# Altium PCB Flahser_4CH_555.PcbDoc
Units mil, origin at the board's own origin, x right, y up, seen from the top; angles counter-clockwise.
Board outline 3937.01 x 1968.5 mil, 2 copper layers (Top Layer, Bottom Layer); 40 components, 31 nets, 110 pads, 0 vias.
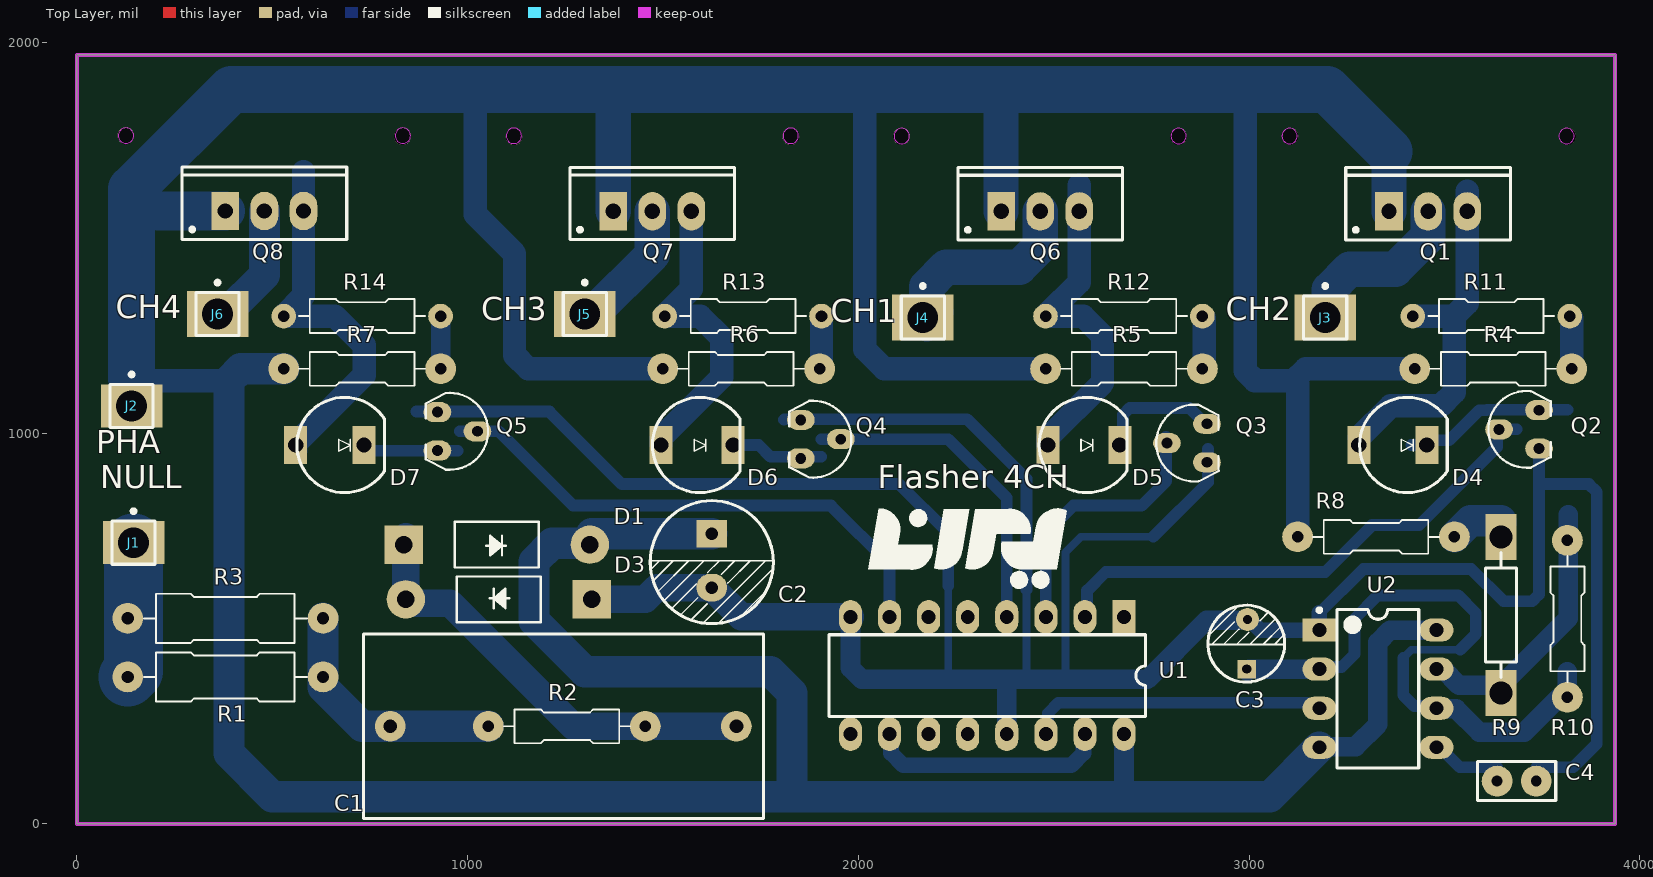
[diagram p0: Top Layer view]
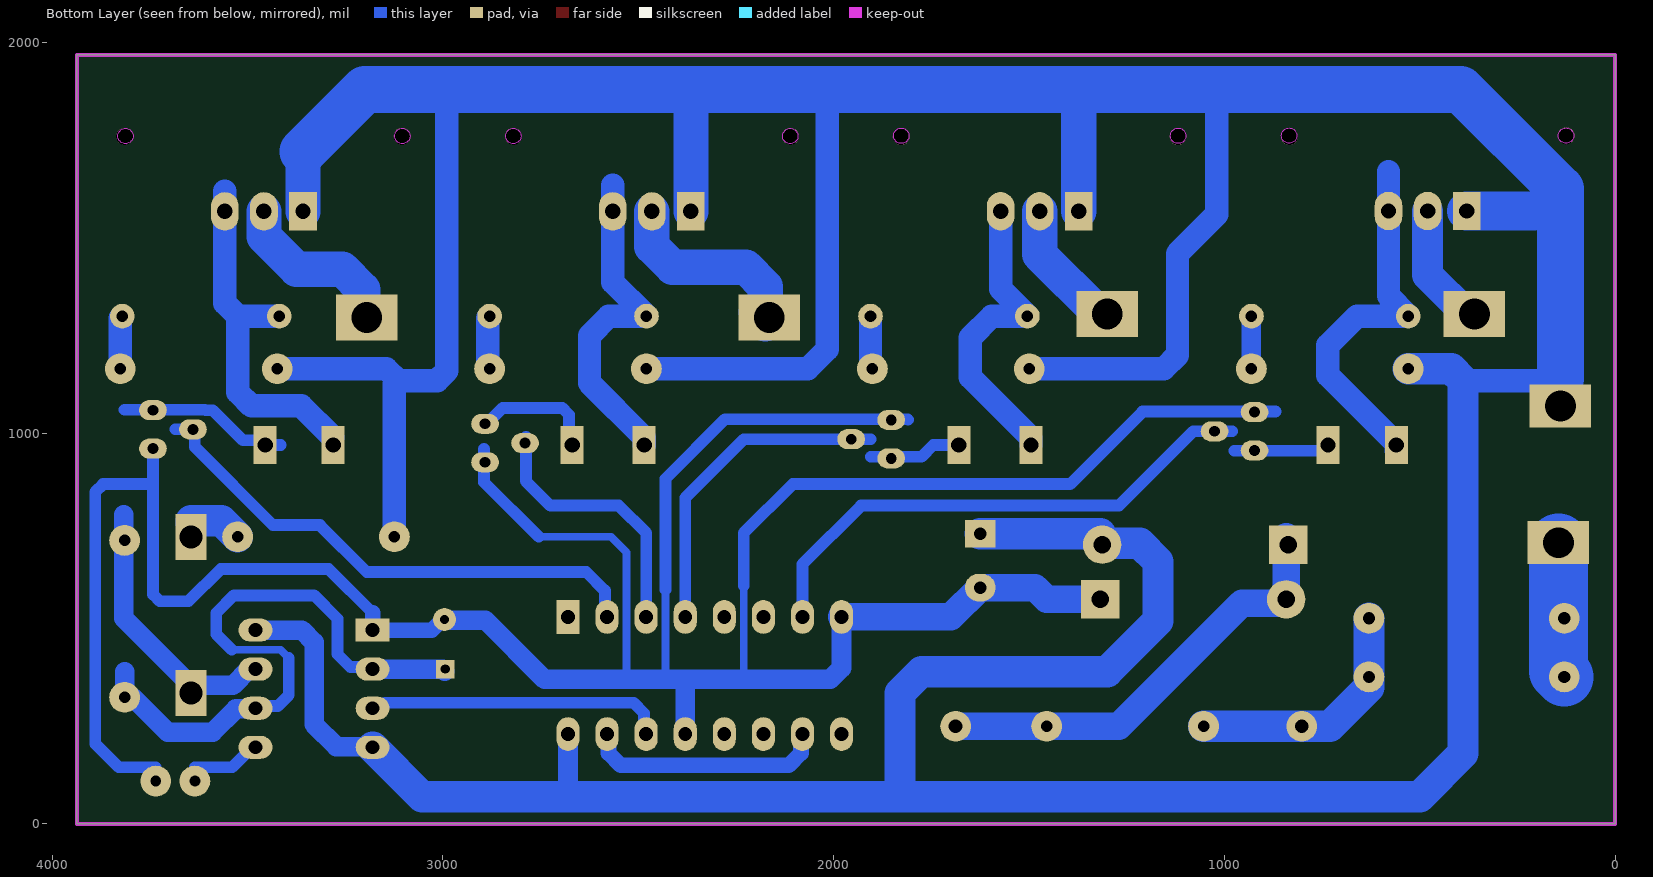
[diagram p1: Bottom Layer view, seen from below]
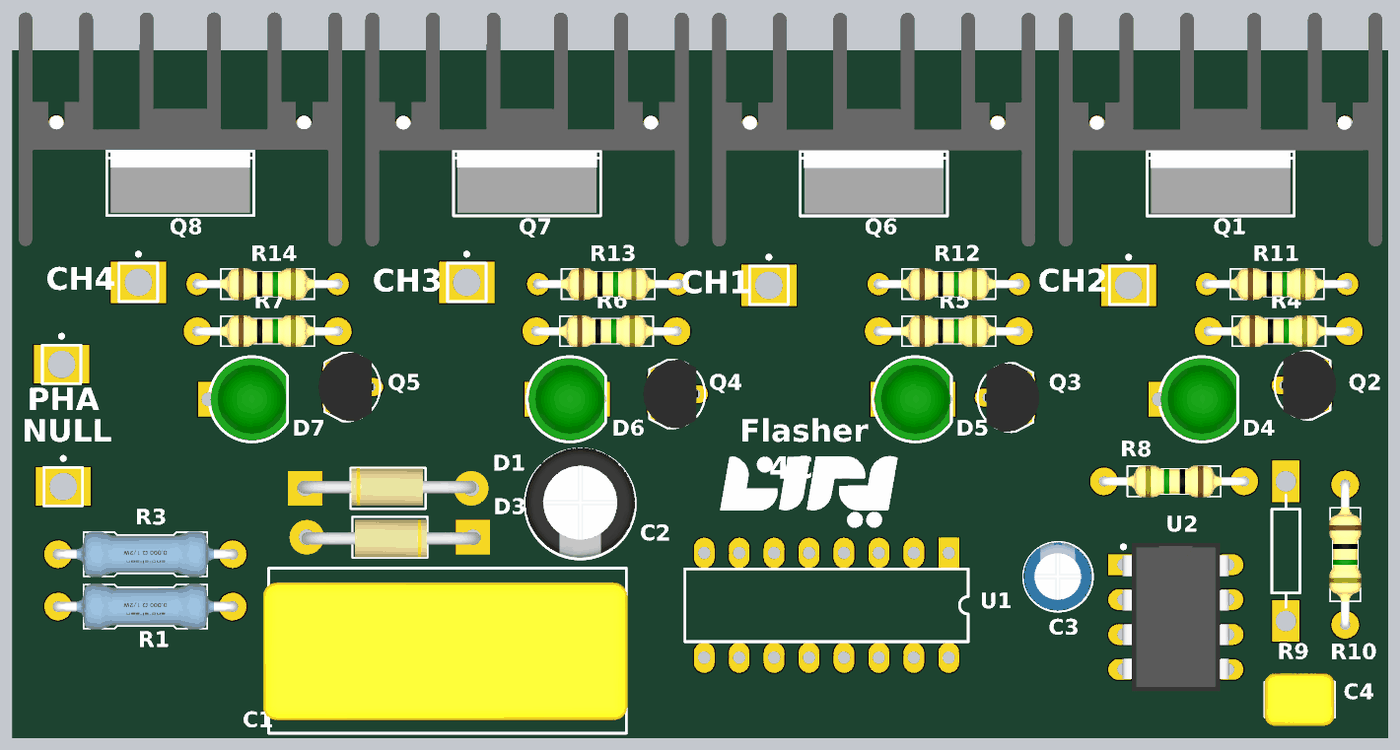
[diagram p2: 3D render of the assembled board from above, using the file's embedded part models]

## Layer stack, top to bottom
Top Solder: solder mask 0.4, Solder Resist, Dk 3.5
Top Layer: signal copper 1.4
Dielectric 1: dielectric 12.6, FR-4, Dk 4.8
Bottom Layer: signal copper 1.4
Bottom Solder: solder mask 0.4, Solder Resist, Dk 3.5

## Board outline
0,0 3937.01,0 3937.01,1968.5 0,1968.5

## Design rules (kind name [scope] priority, off if disabled: settings)
Clearance [All] p1: gap=10 ignorepadtopadclearanceinfootprint=FALSE except(0: Arc-Hole Track-Hole SMDPad-Hole THPad-Hole Via-Hole Fill-Hole Poly-Hole Region-Hole Text-Hole)
PolygonConnect [All] p1: connectstyle=Relief reliefconductorwidth=10 reliefentries=4 polygonreliefangle="90 Angle" airgapwidth=10
RoutingVias [All] p1: holewidth=28 width=50 viastyle="Through Hole" minholewidth=28 minwidth=50 maxholewidth=28 maxwidth=50
SolderMaskExpansion [All] p1: expansion=4 istentingtop=FALSE
Width [All] p1: maxlimit=500 minlimit=10 preferedwidth=30 minimp=50.000000 maximp=50.000000 favimp=50.000000
30 further rules are at their usual default settings.

## Components (designator, comment, footprint, x,y, rotation, side; value= is the part's Value field where it differs from the comment)
C1 "Cap" Cap_polyester_275V_P22.5 1245,250 r180 top value=1uF/275V/X2
C2 "Cap2" "Cap electrolitic radial 8x12-3.5" 1625,673.9 r270 top value=470uF/16V
C3 "Cap2" "Cap electrolitic radial 5x11-2" 2995,460 r90 top value=100uF/16V
C4 "Cap" CAP_MLCC_RAD_0.1 3685,110 r180 top value=10nF
D1 "Diode 1N4007" DO-204AL 1070,710 r0 top
D3 "Diode 1N4007" DO-204AL 1085,580 r180 top
D4 "LED0" LED5MM_RED#1 3405,970 r0 top
D5 "LED0" LED5MM_RED#2 2585,970 r0 top
D6 "LED0" LED5MM_RED#2 1595,970 r0 top
D7 "LED0" LED5MM_RED#3 685,970 r0 top
J1 "Socket" PIN1#1 145,720 r0 top
J2 "Socket" PIN1#1 140,1070 r0 top
J3 "Socket" PIN1#2 3195,1296.3 r0 top
J4 "Socket" PIN1#2 2165,1296.3 r0 top
J5 "Socket" PIN1#2 1300,1305 r0 top
J6 "Socket" PIN1#2 360,1305 r0 top
Q1 "BT137-600" "TO-220 AB with heatsink ya25" 3458.28,1567.83 r0 top
Q2 "2N3904" "TO-92 CF" 3695,1010 r270 top
Q3 "2N3904" "TO-92 CF" 2845,975 r270 top
Q4 "2N3904" "TO-92 CF" 1900,985 r90 top
Q5 "2N3904" "TO-92 CF" 970,1005 r90 top
Q6 "BT137-600" "TO-220 AB with heatsink ya25" 2465.52,1567.83 r0 top
Q7 "BT137-600" "TO-220 AB with heatsink ya25" 1472.76,1568.5 r0 top
Q8 "BT137-600" "TO-220 AB with heatsink ya25" 480,1568.93 r0 top
R1 "Res1" "Axial 0_5W 5_0mm" 380,376.3 r180 top value=100/0.5W
R2 "Res1" "Axial 0_25 W, 0_4 IN LEAD PITCH"#1 1254.21,250 r180 top value=470K
R3 "Res1" "Axial 0_5W 5_0mm" 380,526.3 r180 top value=100/0.5W
R4 "Res1" "Axial 0_25 W, 0_4 IN LEAD PITCH"#1 3625,1165 r0 top value=100
R5 "Res1" "Axial 0_25 W, 0_4 IN LEAD PITCH"#1 2680,1165 r0 top value=100
R6 "Res1" "Axial 0_25 W, 0_4 IN LEAD PITCH"#1 1700,1165 r0 top value=100
R7 "Res1" "Axial 0_25 W, 0_4 IN LEAD PITCH"#1 730,1165 r0 top value=100
R8 "Res1" "Axial 0_25 W, 0_4 IN LEAD PITCH"#1 3325,735 r180 top value=1K
R9 "Res Adj1" AXIAL-0.4 3645,535 r90 top value=10K
R10 "Res1" "Axial 0_25 W, 0_4 IN LEAD PITCH"#1 3815,525 r270 top value=1K
R11 "Res1" "Axial 0_25 W, 0_4 IN LEAD PITCH"#2 3620,1300 r0 top value=270
R12 "Res1" "Axial 0_25 W, 0_4 IN LEAD PITCH"#2 2680,1300 r0 top value=270
R13 "Res1" "Axial 0_25 W, 0_4 IN LEAD PITCH"#2 1705,1300 r0 top value=270
R14 "Res1" "Axial 0_25 W, 0_4 IN LEAD PITCH"#2 730,1300 r0 top value=270
U1 "HCF4017BEY" DIP16 2330,380 r180 top
U2 "LM555CN" 8P3 3330,346.3 r0 top

## Footprints (in the part's own frame and the unit in brackets; to place one, negate y for a bottom-side part, rotate by r counter-clockwise, add the part's x,y. Pads: shape width x height; smd on the part's side, far side on the other; paste and mask are expansions set on the pad)
8P3 [mm] "DIP, 8-Leads, Row Spacing 7.62mm, Pitch 2.54mm, Body 9.59x6.61mm"
  rect 2.2x1.5 hole 0.9: 1(-3.81,3.81)
  oval 2.2x1.5 hole 0.9: 2(-3.81,1.27) 3(-3.81,-1.27) 4(-3.81,-3.81) 5(3.81,-3.81) 6(3.81,-1.27) 7(3.81,1.27) 8(3.81,3.81)
  silkscreen extent -3.93,-5.15 2.65,5.23, body extent -3.88,-5.4 3.88,5.4, height 4.5
"Axial 0_5W 5_0mm" [mm] "Designer Abbas Basereh"
  round 2 hole 0.8: 1(6.35,0) 2(-6.35,0)
  silkscreen extent -5.3,-1.6 5.3,1.6, body extent -6.7,-1.65 6.7,1.65, height 4.02
"Axial 0_25 W, 0_4 IN LEAD PITCH"#1 [mm] "Designer Abbas Basereh"
  round 2 hole 0.75: 1(5.1,0) 2(-5.1,0)
  silkscreen extent -4.1,-1.1 4.1,1.1, body extent -5.4,-1.16 5.36,1.16, height 3.63
"Axial 0_25 W, 0_4 IN LEAD PITCH"#2 [mm] "Designer Abbas Basereh"
  round 1.6 hole 0.75: 1(5.1,0) 2(-5.1,0)
  silkscreen extent -4.1,-1.1 4.1,1.1, body extent -5.4,-1.16 5.36,1.16, height 3.63
AXIAL-0.4 [mm] "Axial Device, Thru-Hole; 2 Leads; 0.4 in Pin Spacing"
  rect 3x2 hole 1.5: 1(-5.08,0) 2(5.08,0)
  silkscreen extent -4.06,-1.02 4.06,1.02
"Cap electrolitic radial 5x11-2" [mm] "Cap electrolitic radial 5x11-2-Design:Abbas Basereh"
  rect 1.2x1.2 hole 0.6: 1(-1.613,0.027)
  round 1.5 hole 0.6: 2(1.614,-0.027)
  silkscreen extent -2.46,-2.45 2.55,2.56, body extent -2.44,-2.42 2.56,2.57, height 11.3
"Cap electrolitic radial 8x12-3.5" [mm] "Cap electrolitic radial 8x12-3.5-Design:Abbas Basereh"
  rect 1.8x2 hole 0.8: 1(-1.75,0)
  oval 1.8x2 hole 0.8: 2(1.75,0)
  silkscreen extent -3.9,-4 4.1,4, body extent -4,-4 4,4, height 12.3
CAP_MLCC_RAD_0.1 [mm]
  round 2 hole 0.7: 1(-1.27,0) 2(1.27,0)
  silkscreen extent -2.54,-1.27 2.54,1.27, body extent -2.51,-1.91 2.57,1.91, height 7.36
Cap_polyester_275V_P22.5 [mm]
  round 2 hole 0.9: 1(11.25,0) 2(-11.25,0)
  silkscreen extent -13,-6 13,6, body extent -13.08,-4.95 13.42,5.05, height 20.6
DIP16 [mm] "DIP; 16 Leads; Row Spacing 7.62 mm; Pitch 2.54 mm"
  rect 1.5x2.2 hole 0.9: 1(-8.89,-3.81)
  oval 1.5x2.2 hole 0.9: 2(-6.35,-3.81) 3(-3.81,-3.81) 4(-1.27,-3.81) 5(1.27,-3.81) 6(3.81,-3.81) 7(6.35,-3.81) 8(8.89,-3.81) 9(8.89,3.81) 10(6.35,3.81) 11(3.81,3.81) 12(1.27,3.81) 13(-1.27,3.81) 14(-3.81,3.81) 15(-6.35,3.81) 16(-8.89,3.81)
  silkscreen extent -10.3,-2.65 10.3,2.65
DO-204AL [mil]
  rect 98.43x98.43 hole 45 mask+0: 1(-233,5)
  round 98.43 hole 45 mask+0: 2(243,5)
  silkscreen extent -103,-54 112,64, body extent -253,-45 257,62, height 107
LED5MM_RED#1 [mm] "LED 5MM THROUGH HOLE RED-Designer Abbas Basereh"
  rect 1.5x2.5 hole 1: 1(-3.142,0) 2(1.27,0)
  silkscreen extent -3.1,-3.1 2.6,3.1, body extent -3,-3 2.5,3, height 9.14
LED5MM_RED#2 [mm] "LED 5MM THROUGH HOLE RED-Designer Abbas Basereh"
  rect 1.5x2.5 hole 1: 1(-2.54,0) 2(2.146,0)
  silkscreen extent -3.1,-3.1 2.6,3.1, body extent -3,-3 2.5,3, height 9.14
LED5MM_RED#3 [mm] "LED 5MM THROUGH HOLE RED-Designer Abbas Basereh"
  rect 1.5x2.5 hole 1: 1(-3.175,0) 2(1.27,0)
  silkscreen extent -3.1,-3.1 2.6,3.1, body extent -3,-3 2.5,3, height 9.14
PIN1#1 [mm] "Connector; Plug"
  rect 4x2.8 hole 2: 1(0,0)
  silkscreen extent -1.4,-1.4 1.4,2.17
PIN1#2 [mm] "Connector; Plug"
  rect 4x3 hole 2: 1(0,0)
  silkscreen extent -1.4,-1.4 1.4,2.17
"TO-92 CF" [mm] "DESIGNER :ABBAS BASEREH"
  oval 1.3x1.8 hole 0.7: 1(1.25,1.2) 2(0,-1.4) 3(-1.25,1.2)
  silkscreen extent -2.5,-2.09 2.5,1.96, body extent -2.5,-1.57 2.5,2.4, height 8.5
"TO-220 AB with heatsink ya25" [mm] "Epoxy meets UL94, V0-Design:Abbas Basereh"
  rect 1.8x2.5 hole 1: 1(-2.54,0)
  oval 1.8x2.5 hole 1: 2(0,0) 3(2.54,0)
  Keep-Out Layer board cut-out: -8.5,4.9 -8.538,5.091 -8.646,5.254 -8.809,5.362 -9,5.4 -9,5.4 -9.191,5.362 -9.354,5.254 -9.462,5.091 -9.5,4.9 -9.5,4.9 -9.5,4.9 -9.462,4.709 -9.354,4.546 -9.191,4.438 -9,4.4 -9,4.4 -8.809,4.438 -8.646,4.546 -8.538,4.709 -8.5,4.9 -8.5,4.9
  Keep-Out Layer board cut-out: 9.5,4.9 9.462,5.091 9.354,5.254 9.191,5.362 9,5.4 9,5.4 8.809,5.362 8.646,5.254 8.538,5.091 8.5,4.9 8.5,4.9 8.5,4.9 8.538,4.709 8.646,4.546 8.809,4.438 9,4.4 9,4.4 9.191,4.438 9.354,4.546 9.462,4.709 9.5,4.9 9.5,4.9
  silkscreen extent -5.35,-1.85 5.35,2.85, body extent -11.75,-4.08 11.75,12.92, height 25

## Part data
C1 C2 C3 C4: "Capacitor", Publisher="Altium Limited"
  C1 C4: LatestRevisionDate=17-Jul-2002, LatestRevisionNote="Re-released for DXP Platform.", PackageDescription="Radial Cap, Thru-Hole; 2 Leads; 0.3 in Pin Spacing", PackageReference=RAD-0.3, Published=8-Jun-2000
  C2 C3: PackageDescription="Capacitor; 2 Leads", PackageReference=CAPR5-4X5, Published=23-Sep-2002
D1 D3: "1 Amp General Purpose Rectifier", Code_JEDEC=DO-204-AL, ComponentLink1Description="Manufacturer Link", ComponentLink1URL=http://www.fairchildsemi.com/, ComponentLink2Description=Datasheet, ComponentLink2URL=http://www.fairchildsemi.com/ds/1N%2F1N4001.pdf, DatasheetVersion=1998, LatestRevisionDate=17-Jul-2002, LatestRevisionNote="Re-released for DXP Platform.", PackageDescription="Diode, Axial; Body 5.2 x 2.7 mm (LxDia. max), Lead Dia. 0.86 mm (max)", PackageReference=DO-41, PackageVersion=Aug-1999, Published=8-Jun-2000, Publisher="Altium Limited"
D4 D5 D6 D7: "Typical INFRARED GaAs LED", LatestRevisionDate=08-Jul-2005, LatestRevisionNote="Mech Layer 1 removed.", PackageDescription="LED; 2 Leads", PackageReference=LED-0, Published=8-Jun-2000, Publisher="Altium Limited"
Q1 Q6 Q7 Q8: library part Triac, "Silicon Bidirectional Triode Thyristor", ComponentLink1Description="Manufacturer Link", ComponentLink1URL=http://www.motorola.com/, DatasheetVersion=1999, LatestRevisionDate=17-Jul-2002, LatestRevisionNote="Re-released for DXP Platform.", Note="Pin 2 is electrically connected to Pin 4 (TAB)", PackageDescription="TO, Thru-Hole, Vertical, Heatsink Mounted; 3 In-Line Leads; Pitch 2.28 mm", PackageReference=369-03, Published=29-Sep-2000, Publisher="Altium Limited"
Q2 Q3 Q4 Q5: "NPN General Purpose Amplifier", ComponentLink1Description="Manufacturer Link", ComponentLink1URL=http://www.fairchildsemi.com/, ComponentLink2Description=Datasheet, ComponentLink2URL=http://www.fairchildsemi.com/ds/2N%2F2N3904.pdf, DatasheetVersion=1997, LatestRevisionDate=15-Jan-2003, LatestRevisionNote="PCB Footprint 'BCY-W3/D4.7' replaced", PackageDescription="TO, Flat Index; 3 In-Line, Axial Leads; Body Dia. 4.5mm; Leads 0.51 x 0.48 mm (max)", PackageReference=TO-92A, PackageVersion=Sep-1998, Published=8-Jun-2000, Publisher="Altium Limited"
R1 R2 R3 R4 R5 R6 R7 R8 R10 R11 R12 R13 R14: "Resistor", LatestRevisionDate=17-Jul-2002, LatestRevisionNote="Re-released for DXP Platform.", PackageDescription="Axial Device, Thru-Hole; 2 Leads; 0.3 in Pin Spacing", PackageReference=AXIAL-0.3, Published=8-Jun-2000, Publisher="Altium Limited"
R9: "Variable Resistor", LatestRevisionDate=17-Jul-2002, LatestRevisionNote="Re-released for DXP Platform.", PackageDescription="Axial Device, Thru-Hole; 2 Leads; 0.7 in Pin Spacing", PackageReference=AXIAL-0.7, Published=8-Jun-2000, Publisher="Altium Limited", Set Position=0.5
U1: "Decade Counter with 10 Decoded Outputs", ComponentLink1Description="Manufacturer Link", ComponentLink1URL=http://www.st.com/, ComponentLink2Description=Datasheet, ComponentLink2URL=http://www.st.com/stonline/products/literature/ds/2029/hcf4017.pdf, DatasheetVersion=Jun-1989, LatestRevisionDate=06-Jun-2005, LatestRevisionNote="Stylized 3D Model Added.", PackageDescription="DIP; 16 Leads; Row Spacing 7.62 mm; Pitch 2.54 mm", PackageReference=DIP16, PackageVersion=Apr-1996, Published=8-Jun-2000, Publisher="Altium Limited"
U2: "Timer, 8-pin MDIP", Manufacturer="National Semiconductor", PackageTopMarking=NSUZXYTTE#*LM*555CN, PowerWise=N, Supplier Part Number 1=9488235, Code_JEDEC=MS-001-BA, ComponentLink1Description="LM555 Datasheet", ComponentLink1URL=http://www.national.com/ds/LM/LM555.pdf, ComponentLink2Description="LM555 Web Page", ComponentLink2URL=http://www.national.com/pf/LM/LM555.html, ComponentLink3Description="N08E Package Page", ComponentLink3URL=http://www.national.com/packaging/folders/n08e.html, CompType="Analog IC", DatasheetVersion=Jul-2006, PackageDescription="MDIP, .365 x .250 x .130in, 8 Lead, .100in Pitch", PackageReference=N08E, PackageVersion="revG, May-2006", PartNumber=LM555CN, PinCount=8, Published=4-Dec-2008, Publisher="Altium Limited", RoHS=N, Supplier 1=Farnell
J1 J2 J3 J4 J5 J6: LatestRevisionDate=17-Jul-2002, LatestRevisionNote="Re-released for DXP Platform.", Publisher="Altium Limited"

## Free pads (board coordinates)
  round 43.31 hole 43.31: ""(125,1761.3) ""(833.58,1759.6) ""(1118.82,1759.17) ""(1827.4,1759.17) ""(2110,1760) ""(2820,1760) ""(3105,1760) ""(3815,1760)

## Nets (pads, with @x,y where several pads share a name; then routed paths per layer and width w, separated by ;. In a path a pad name is that pad's centre, name@x,y a point inside that pad or via, vN(x,y) a via of type N, cw(c..) or ccw(c..) an arc to the next point about the centre after c; other vN are vias at no path point)
CLK: U1.14 U2.3 | length 766.9
  Bottom Layer w30: U1.14 2485.56,235.56 2485.56,283.55 2512.01,310 3148.59,310 3162.3,296.3 U2.3
GND: C2.2 C3.2 C4.1 D3.1 Q2.1 Q3.1 Q4.1 Q5.1 U1.8 U1.13 U2.1 | length 8216.7
  Bottom Layer w20: 2225,370 2230,375 2230,610 ; 2425,370 2430.47,375.47 2430.47,599.53 ; 2530,370 2530,695 2570,735 2755,735
  Bottom Layer w30: 869.41,1055.59 1209.41,1055.59 1395,870 2105,870 2230,745 2230,610 ; 1810,1035 1810.59,1035.59 2278.4,1035.59 2430.47,883.52 2430.47,599.53 ; 2755,735 2895,875 2895,960 ; 3180,540 3292.5,652.5 3569.07,652.5 3651.57,570 3724.67,570 3742.24,587.57 3742.24,870 ; C4.1@3735,145 3830,145 3890,205 3890,850 3870,870 3742.24,870 ; Q2.1 3742.24,870
  Bottom Layer w40: C3.2 3001.22,523.52 3028.44,496.3 U2.1 3180,540
  Bottom Layer w50: U1.8 1980,399.29 2009.29,370 2225,370 2425,370 2530,370 2740,370 2891.79,521.79 2994.33,521.79 C3.2 ; U1.13 2380,360
  Bottom Layer w70: D3.1 1454.77,575 1484.6,604.83 1624.83,604.83 C2.2 1625.23,605 1700.23,530 U1.8
NetC1_1: C1.1 R1.2 R2.1 R3.2 | length 641.1
  Bottom Layer w80: R3.2 R1.2 630,350 730,250 R2.1
NetC1_2: C1.2 D1.1 D3.2 R2.2 | length 1140.5
  Bottom Layer w70: D1.1@842,735 D3.2 852,565 955,565 1270,250 R2.2 C1.2
NetC3_1: C3.1 R10.1 U2.2 U2.6 | length 1634.4
  Bottom Layer w20: 3395,425 3415.83,445.83 3540.83,445.83 3541.06,446.06
  Bottom Layer w30: U2.2 3185.56,401.86 3236.86,401.86 3270,435 3270,525 3330,585 3535,585 3580,540 3580,485.47 3540.83,446.3 ; 3395,425 3395,330 3423.14,301.86 3474.44,301.86 U2.6
  Bottom Layer w50: C3.1@2995,391.26 3000.04,396.3 U2.2 ; U2.6 3481.73,294.57 3529.72,294.57 3589.29,235 3705,235 R10.1@3792.51,322.51 ; R10.1 3815,389.21
NetC4_2: C4.2 U2.5 | length 176.2
  Bottom Layer w30: U2.5 3487.86,196.3 3539.16,145 C4.2@3635,145
NetD4_2: D4.2 Q2.3 | length 437.8
  Bottom Layer w30: 3415,970 D4.2 3466.95,981.95 3511.95,981.95 3589.21,1059.21 3607.71,1059.21 3609.08,1060.59 3814.41,1060.59 3815,1060
NetD5_2: D5.2 Q3.3 | length 319.7
  Bottom Layer w30: D5.2 2677.43,977.94 2677.43,1047.43 2695,1065 2847.35,1065 2888.13,1024.21 Q3.3
NetD6_2: D6.2 Q4.3 | length 237.9
  Bottom Layer w30: D6.2 1745,970 1775,940 1905,940
NetD7_2: D7.2 Q5.3 | length 240
  Bottom Layer w30: D7.2@735,955 975,955
NetJ1_1: J1.1 R1.1 R3.1 | length 349.9
  Bottom Layer w150: R1.1 145,391.3 J1.1
NetJ3_1: J3.1 Q1.2 | length 449.3
  Bottom Layer w90: J3.1 3205,1306.3 3205,1367.28 3257.72,1420 3375,1420 3458.28,1503.28 Q1.2
NetJ4_1: J4.1 Q6.2 | length 557.7
  Bottom Layer w90: J4.1 J4.1@2175,1296.3 ; J4.1@2175,1280 J4.1@2175,1296.3 ; J4.1@2198.74,1310.35 2184.69,1296.3 J4.1@2175,1296.3 ; Q6.2 2465.52,1477.72 2412.8,1425 2225,1425 2175,1375 J4.1@2175,1296.3
NetJ5_1: J5.1 Q7.2 | length 346.6
  Bottom Layer w90: J5.1 1319.69,1305 1472.76,1458.07 Q7.2
NetJ6_1: J6.1 Q8.2 | length 325.2
  Bottom Layer w80: J6.1 379.69,1305 480,1405.31 Q8.2
NetR4_1: R4.1 R11.1 | length 137.1
  Bottom Layer w60: R11.1 3820.79,1299.19 3825.79,1294.19 R4.1
NetR5_1: R5.1 R12.1 | length 137.1
  Bottom Layer w60: R12.1 2880.79,1299.19 2885.79,1294.19 R5.1@2885.79,1165
NetR6_1: R6.1 R13.1 | length 137.1
  Bottom Layer w60: R6.1 1900.79,1170.07 1905.79,1175.07 R13.1
NetR7_1: R7.1 R14.1 | length 135
  Bottom Layer w50: R7.1 R14.1
NetR8_2: R8.2 R9.2 | length 136.4
  Bottom Layer w80: R8.2 3566.74,775.94 3644.37,775.94 R9.2@3645,776.57
NetR9_1: R9.1 R10.2 U2.7 | length 695.9
  Bottom Layer w50: U2.7 3496.23,396.3 3537.53,355 R9.1@3630.63,355 ; R9.1 3645,354.68 3817.49,527.17 3817.49,791.7
NetU1_10: U1.10 U1.15 | length 619
  Bottom Layer w40: U1.10 2083.65,226.35 2083.65,181.35 2115,150 2545,150 2576.35,181.35 2576.35,226.35 U1.15
OUT1: D4.1 Q1.3 R11.2 | length 925.7
  Bottom Layer w60: D4.1@3281.77,989.21 3362.56,1070 3489.85,1070 3525,1105.15 3525,1300 ; R11.2 3525,1300 ; 3558.28,1620 Q1.3 3558.28,1333.28 3525,1300
OUT2: D5.1 Q6.3 R12.2 | length 875.2
  Bottom Layer w60: D5.1 2485,988.74 2625,1128.74 2625,1250 2575.57,1299.43 2479.78,1299.43 R12.2 2565.52,1386.31 Q6.3 ; Q6.3@2565,1567.83 2565,1635
OUT3: D6.1 Q7.3 R13.2 | length 804.7
  Bottom Layer w60: D6.1 1495,988.74 1650,1143.74 1650,1245 1595.57,1299.43 1504.78,1299.43 R13.2 1504.21,1300.81 1572.76,1369.36 Q7.3
OUT4: D7.1 Q8.3 R14.2 | length 970.4
  Bottom Layer w60: D7.1@560,955 560,973.74 735,1148.74 735,1225 660,1300 R14.2 529.21,1300.81 580,1351.6 Q8.3 580,1670
Q0: Q3.2 U1.3 | length 690.7
  Bottom Layer w30: U1.3 2480,745 2550,815 2725,815 2787.64,877.64 Q3.2@2787.64,990.79
Q1: Q2.2 U1.2 | length 1363.6
  Bottom Layer w30: U1.2 2585.56,535.56 2585.56,597.43 2633.13,645 3195,645 3315,765 3435,765 3635.1,965.1 3635.1,1005.22 Q2.2 3685,1010
Q2: Q4.2 U1.4 | length 842.1
  Bottom Layer w30: 1905,985 2230,985 2380,835 U1.4
Q3: Q5.2 U1.7 | length 1375.8
  Bottom Layer w30: 980,1005 1000,1005 Q5.2 1080,1005 1270,815 1930,815 2080,665 U1.7
VCC: C2.1 D1.2 J2.1 Q1.1 Q6.1 Q7.1 Q8.1 R4.2 R5.2 R6.2 R7.2 R8.1 U1.16 U2.4 U2.8 | length 15193
  Bottom Layer w50: 2680,90 U1.16 ; U2.4 3181.73,198.03 3273.03,198.03 3330,255 3330,465 3361.3,496.3 U2.8
  Bottom Layer w60: 140,1140 145,1135 389.21,1135 ; 1020,1880 1020,1560 1120,1460 1120,1200.15 1155.15,1165 R6.2 ; 2020,1880 2016.52,1876.52 2016.52,1215 2066.52,1165 R5.2 R5.2@2484.21,1165 ; 2990,1880 2990,1160.15 3015.15,1135 3115,1135 ; R8.1 3124.21,1125.79 3115,1135 ; R4.2 3145,1165 3115,1135
  Bottom Layer w80: R7.2 419.21,1165 389.21,1135 389.21,180.79 500,70 3053.7,70 U2.4 ; D1.2 1309.47,718.53 1216.86,718.53 1170,671.66 1170,520 1300,390 1775,390 1830,335 1830,116.86 ; D1.2@1313.01,735 D1.2@1318,735 ; D1.2@1318,742.8 C2.1
  Bottom Layer w90: Q7.1 1372.76,1877.76 ; Q6.1 2365.52,1875.52 ; Q1.1 3358.28,1721.72
  Bottom Layer w100: 208.93,1568.93 Q8.1 ; 1372.76,1877.76 1375,1880 ; 2365.52,1875.52 2370,1880
  Bottom Layer w120: 140,1140 140,1625 395,1880 1020,1880 1375,1880 2020,1880 2370,1880 2990,1880 3200,1880 3358.28,1721.72
pads on no net: U1.1 U1.5 U1.6 U1.9 U1.11 U1.12

## Keep-outs
Keep-Out Layer:
  the board outline again, w10

## Silkscreen, mask and mechanical layers (free items; w line width, h text height)
Top Overlay:
  drawing of 7 lines, arcs and shapes, not listed
  text "CH4" at 100,1275 h100
  text "CH3" at 1035,1270 h100
  text "CH2" at 2940,1270 h100
  text "CH1" at 1930,1265 h100
  text "PHA" at 50,930 h100
  text "NULL" at 60,840 h100
  text "Flasher 4CH" at 2050,840 h100

## Dimensions
0,0 to 3937.01,0 on Mechanical 15
0,0 to 0,1968.5 on Mechanical 15